# Altium PCB Open lid.PcbDoc
Units mil, origin at the board's own origin, x right, y up, seen from the top; angles counter-clockwise.
Board outline 4053.4 x 2111.4 mil, 2 copper layers (Top Layer, Bottom Layer); 37 components, 0 nets, 90 pads, 2 vias.
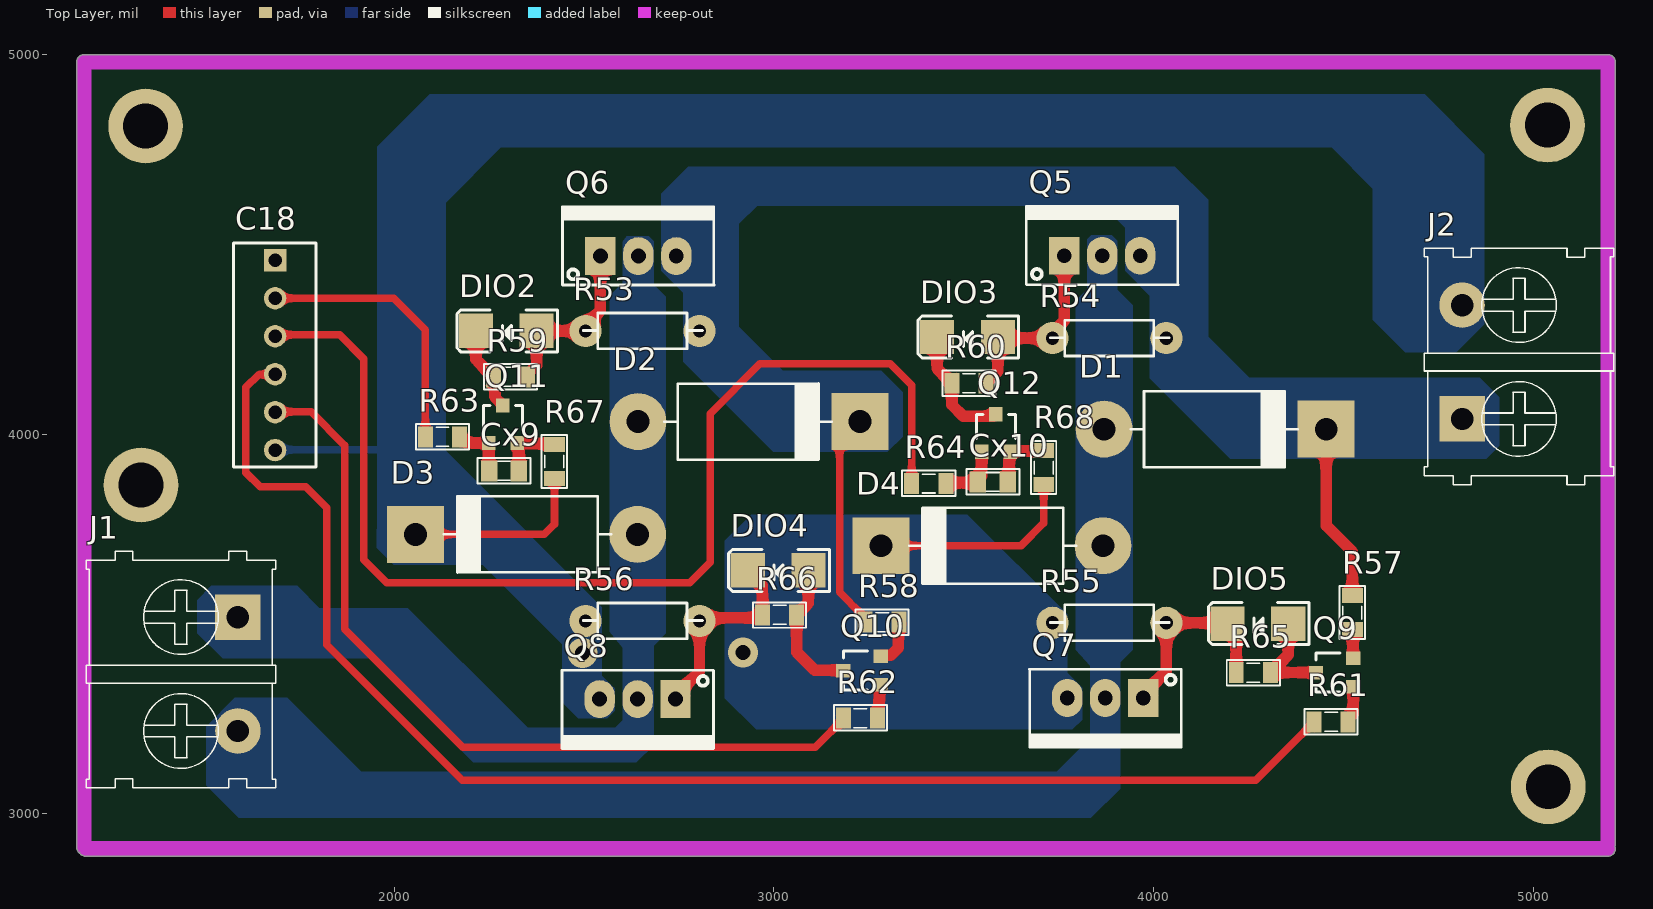
[diagram p0: Top Layer view]
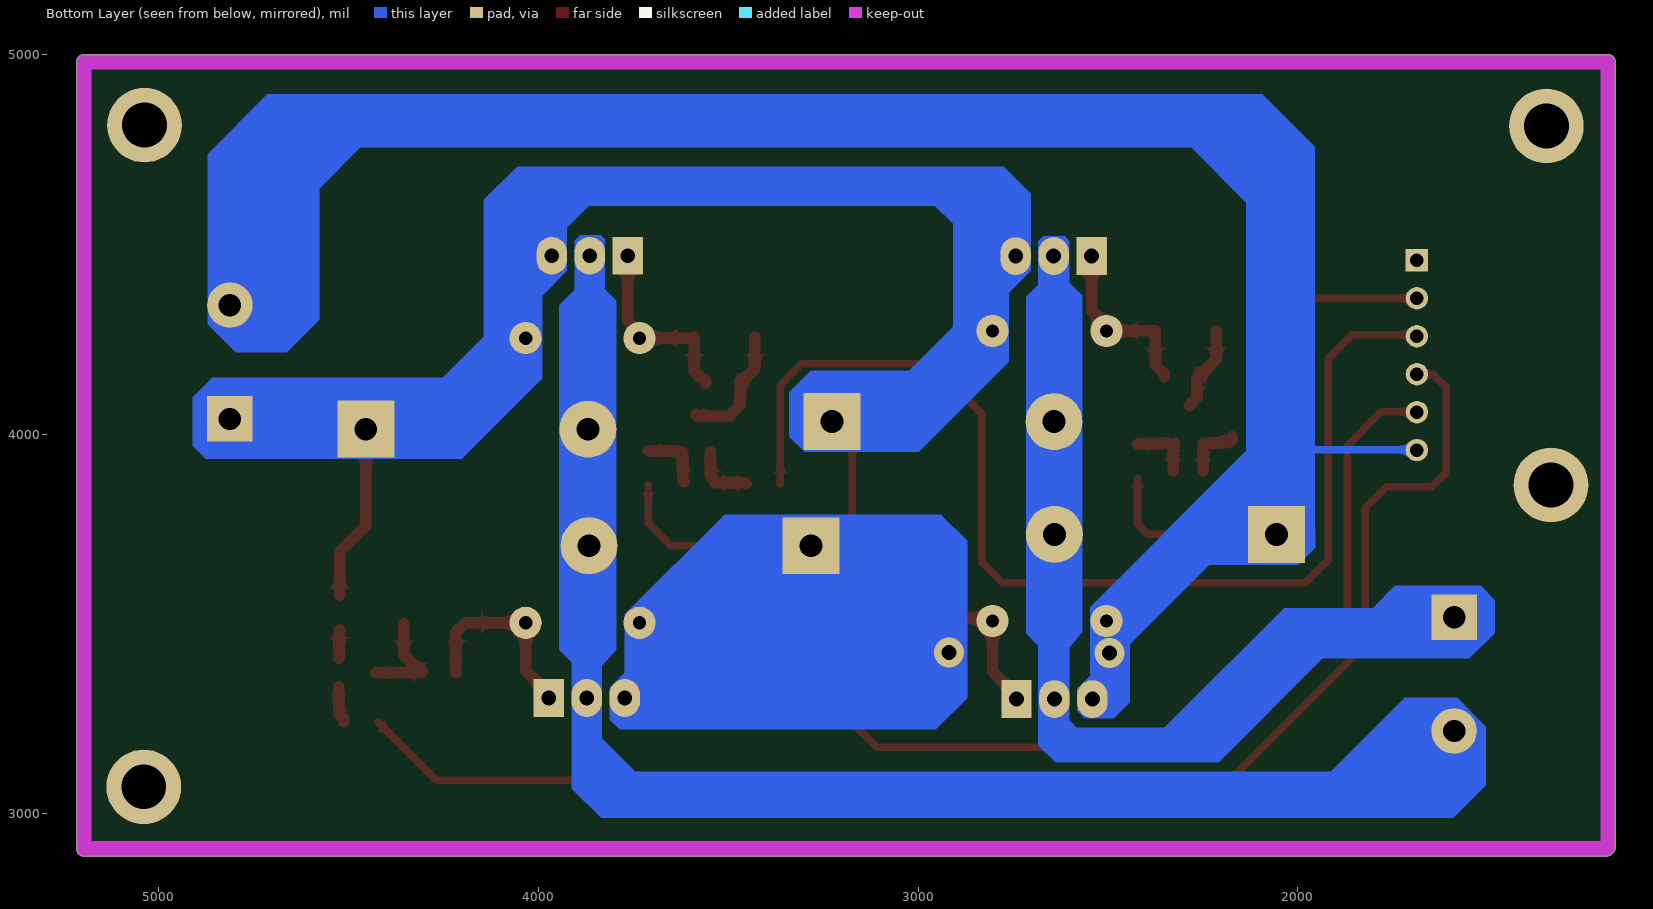
[diagram p1: Bottom Layer view, seen from below]

## Layer stack, top to bottom
Top Solder: solder mask 0.4, Solder Resist, Dk 3.5
Top Layer: signal copper 1.4
Dielectric 1: dielectric 12.6, FR-4, Dk 4.8
Bottom Layer: signal copper 1.4
Bottom Solder: solder mask 0.4, Solder Resist, Dk 3.5

## Board outline
1171.21,2896.21 cw(c1183,2912) 1163.3,2912 1163.3,4980 cw(c1183,4980) 1183,4999.7 5197,4999.7 cw(c5197,4980) 5216.7,4980 5216.7,2920 cw(c5197,2920) 5215.76,2914 cw(c5197,2908) 5216.7,2908 cw(c5197,2908) 5197,2888.3 1187,2888.3 cw(c1187,2908)

## Design rules (kind name [scope] priority, off if disabled: settings)
Clearance [All] p1: gap=10 ignorepadtopadclearanceinfootprint=FALSE
PlaneConnect [All] p1: planeconnectstyle=Direct reliefexpansion=20 reliefentries=4 reliefconductorwidth=10 reliefairgap=10
PolygonConnect [All] p1: connectstyle=Direct reliefconductorwidth=10 reliefentries=4 polygonreliefangle="90 Angle" airgapwidth=10
RoutingVias [All] p1: holewidth=28 width=50 viastyle="Through Hole" minholewidth=28 minwidth=50 maxholewidth=28 maxwidth=50
SolderMaskExpansion [All] p1: expansion=4 istentingtop=FALSE
Width [All] p1: maxlimit=30 minlimit=10 preferedwidth=20
29 further rules are at their usual default settings.

## Components (designator, comment, footprint, x,y, rotation, side; value= is the part's Value field where it differs from the comment)
C18 "Header6" HDR6 1686,4458 r270 top
Cx9 "104" CN-SMD-0805 2289,3903 r180 top value=33pF
Cx10 "104" CN-SMD-0805 3577,3874 r180 top value=33pF
D1 "5A" DIO-5A#1 4430,4013 r180 top value=1N5007
D2 "5A" DIO-5A#2 3202,4033 r180 top value=1N5007
D3 "5A" DIO-5A#1 2081,3736 r0 top value=1N5007
D4 "5A" DIO-5A#1 3307,3706 r0 top value=1N5007
DIO2 "M7" DIO-SMD-106 2295,4272 r0 top value=1N5007
DIO3 "M7" DIO-SMD-106 3510,4256 r0 top value=1N5007
DIO4 "M7" DIO-SMD-106 3011,3641 r0 top value=1N5007
DIO5 "M7" DIO-SMD-106 4275,3501 r0 top value=1N5007
J1 "KF2" KF2-7.62 1438,3368 r270 top
J2 "KF2" KF2-7.62 4963,4190 r90 top
Q5 "IRF4905" TO220-123 3765,4470 r0 top value=IRF840
Q6 "IR4905" TO220-123 2543,4469 r0 top value=IRF840
Q7 "IRF3205" TO220-123 3973,3305 r180 top value=IRF840
Q8 "IRF3205" TO220-123 2741,3302 r180 top value=IRF840
Q9 "2SA1015" SOT23-321 4477.21,3372 r90 top value=A1015
Q10 "2SA1015" SOT23-321 3232.21,3377 r90 top value=A1015
Q11 "2SC1815" SOT23-321 2286,4026 r0 top value=C1815
Q12 "2SC1815" SOT23-321 3585,4003 r0 top value=C1815
R53 "1k" RES-1/4W-SMALL 2664,4272 r180 top
R54 "1k" RES-1/4W-SMALL 3894,4253 r180 top
R55 "10k" RES-1/4W-SMALL 3894,3503 r180 top
R56 "10k" RES-1/4W-SMALL 2664,3508 r180 top
R57 "1k" RES-SMD-0805#1 4524,3530 r270 top
R58 "1k" RES-SMD-0805#1 3285,3505 r0 top
R59 "1k" RES-SMD-0805#2 2306,4151 r180 top
R60 "1k" RES-SMD-0805#2 3514,4134 r180 top
R61 "1k" RES-SMD-0805#2 4468,3242 r180 top
R62 "1k" RES-SMD-0805#2 3228,3252 r180 top
R63 "1k" RES-SMD-0805#2 2127,3993 r180 top
R64 "1k" RES-SMD-0805#2 3408,3870 r180 top
R65 "1k" RES-SMD-0805#2 4263,3372 r0 top
R66 "1k" RES-SMD-0805#2 3015,3524 r0 top
R67 "1k" RES-SMD-0805#1 2422,3928 r270 top
R68 "1k" RES-SMD-0805#1 3711,3912 r270 top

## Footprints (in the part's own frame and the unit in brackets; to place one, negate y for a bottom-side part, rotate by r counter-clockwise, add the part's x,y. Pads: shape width x height; smd on the part's side, far side on the other; paste and mask are expansions set on the pad)
CN-SMD-0805 [mil]
  rect 43.31x55 smd paste+0 mask-55: 1(-39.36,0.01) 2(39.37,0.01)
  silkscreen extent -70,-34 70,33, body extent -39,-25 39,25, height 31
DIO-5A#1 [mil] "Diode 5A, W 200mil, L 550mil"
  round 150 hole 60 paste+0 mask-150: 1(560,0)
  rect 150x150 hole 60 paste+0 mask-150: 2(-25,0)
  silkscreen extent 50,-100 490,100, body extent -52,-106 590,103, height 211
DIO-5A#2 [mil] "Diode 5A, W 200mil, L 550mil"
  round 150 hole 60 paste+0 mask-150: 1(560,0)
  rect 150x150 hole 60 paste+0: 2(-25,0)
  silkscreen extent 50,-100 490,100, body extent -52,-106 590,103, height 211
DIO-SMD-106 [mil]
  rect 90x90.55 smd paste+0 mask-90.55: 1(80,0) 2(-80,0)
  silkscreen extent -130,-55 135,55, body extent -99,-50 106,52, height 95
HDR6 [mm] "Connector; Header; 6 Position"
  rect 1.5x1.5 hole 0.9 paste+0 mask-1.5: 1(0,0)
  round 1.5 hole 0.9 paste+0 mask-1.5: 2(2.54,0) 3(5.08,0) 4(7.62,0) 5(10.16,0) 6(12.7,0)
  silkscreen extent -1.14,-2.79 13.84,2.74, body extent -1.27,-2.92 13.97,2.88, height 11.72
KF2-7.62 [mil]
  rect 120x120 hole 59.06 paste+0 mask-120: 1(-150,150)
  round 120 hole 59.06 paste+0 mask-120: 2(150,150)
  silkscreen extent -324,-250 300,250, body extent -300,-241 300,231, height 337
RES-1/4W-SMALL [mil]
  round 85 hole 35 paste+0 mask-85: 1(-140,0) 2(160,0)
  silkscreen extent -148,-47 166,47, body extent -152,-47 172,47, height 97
RES-SMD-0805#1 [mil]
  rect 39.37x55 smd: 1(-45,0) 2(45,0)
  silkscreen extent -70,-34 70,33, body extent -39,-25 39,25, height 31
RES-SMD-0805#2 [mil]
  rect 39.37x55 smd paste+0 mask-55: 1(-45,0) 2(45,0)
  silkscreen extent -70,-34 70,33, body extent -39,-25 39,25, height 31
SOT23-321 [mm]
  rect 0.9x0.95 smd mask+0: 1(0.95,-1.25)
  rect 0.9x0.95 smd paste+0 mask-0.95: 2(0,1.25) 3(-0.95,-1.25)
  silkscreen extent -1.3,-0.38 1.3,1.25, body extent -1.52,-1.23 1.48,1.27, height 1.06
TO220-123 [mil] "TO-220 - 1-2-3"
  rect 80x100 hole 39 paste+0 mask-100: 1(0,0)
  oval 80x100 hole 39 paste+0 mask-100: 2(100,0) 3(200,0)
  silkscreen extent -100,-76 300,130, body extent -95,-80 295,97, height 323

## Part data
C18: "Header IDC, 6 x 1 Pin Vertical 2.54mm Pitch (Non-Boxed, Male)", Manufacturer="W¨¹rth Elektronik eiSos GmbH", partNo=613002143121, ComponentLink1 Description=Manufacturer, ComponentLink1URL=http://www.we-online.com, ComponentLink2 Description=Datasheet, ComponentLink2URL=http://katalog.we-online.de/em/datasheet/6130xx143121.pdf, Created by="Karrer Zheng", Created Date="29 March 2013", NoPins=02
Cx9 Cx10: library part CN
D1 D2 D3 D4: library part Diode, "Default Diode", Code - JEDEC=DO-214-AB, Published=8-Jun-2000, Publisher="Altium Limited", Revision="July-2002: Re-released for DXP Platform."
DIO2 DIO3 DIO4 DIO5: library part "Diode SMD", "Default Diode", Code - JEDEC=DO-214-AB, Published=8-Jun-2000, Publisher="Altium Limited", Revision="July-2002: Re-released for DXP Platform."
J1 J2: Manufacturer="Würth Elektronik eiSos GmbH", partNo=691103110002, ComponentLink1 Description=Manufacturer, ComponentLink1URL=http://www.we-online.com, ComponentLink2 Description=Datasheet, ComponentLink2URL=http://katalog.we-online.de/em/datasheet/6911031100xx.pdf, Created by="Karrer Zheng", Created Date="29 October 2013", NoPins=2
Q5 Q6: library part IRF9540, "HEXFET P-Channel Power MOSFET"
Q7 Q8: library part IRFZ44
Q9 Q10: "PNP 600mW, ECB"
Q11 Q12: "NPN 600mW, ECB"
R53 R54 R55 R56: library part Res, "Res", Manufacturer="Generic Components", Class=Passive, Published=08/06/2000, Publisher="Altium Hobart Technology Centre", SubClass=R
R57 R58 R59 R60 R61 R62 R63 R64 R65 R66 R67 R68: library part Res-SMD, "Resistor", Manufacturer="Generic Components", Class=Passive, Published=08/06/2000, Publisher="Altium Hobart Technology Centre"

## Free pads (board coordinates)
  round 196.85 hole 118.11 paste+0 mask+0: 2(1333,3866) 2(1345,4812) 2(5038,4814) 2(5040,3071)

## Via types
v1: diameter 78.74, hole 39.37, Top Layer to Bottom Layer, 2 vias

## Nets (pads, with @x,y where several pads share a name; then routed paths per layer and width w, separated by ;. In a path a pad name is that pad's centre, name@x,y a point inside that pad or via, vN(x,y) a via of type N, cw(c..) or ccw(c..) an arc to the next point about the centre after c; other vN are vias at no path point)
pads on no net: C18.1 C18.2 C18.3 C18.4 C18.5 C18.6 Cx9.1 Cx9.2 Cx10.1 Cx10.2 D1.1 D1.2 D2.1 D2.2 D3.1 D3.2 D4.1 D4.2 DIO2.1 DIO2.2 DIO3.1 DIO3.2 DIO4.1 DIO4.2 DIO5.1 DIO5.2 J1.1 J1.2 J2.1 J2.2 Q5.1 Q5.2 Q5.3 Q6.1 Q6.2 Q6.3 Q7.1 Q7.2 Q7.3 Q8.1 Q8.2 Q8.3 Q9.1 Q9.2 Q9.3 Q10.1 Q10.2 Q10.3 Q11.1 Q11.2 Q11.3 Q12.1 Q12.2 Q12.3 R53.1 R53.2 R54.1 R54.2 R55.1 R55.2 R56.1 R56.2 R57.1 R57.2 R58.1 R58.2 R59.1 R59.2 R60.1 R60.2 R61.1 R61.2 R62.1 R62.2 R63.1 R63.2 R64.1 R64.2 R65.1 R65.2 R66.1 R66.2 R67.1 R67.2 R68.1 R68.2
copper on no net: | length 16385.6
  Top Layer w20: 1686,4058 1686.91,4058.91 1781.09,4058.91 1870,3970 1870,3486 2181,3175 3109,3175 3163.5,3229.5 3171.32,3229.5 3181,3239.19 3181,3247 ; 1686,4158 1684.91,4156.91 1642.91,4156.91 1609,4123 1609,3899 1647,3861 1767,3861 1822,3806 1822,3445 2179,3088 4269,3088 4423,3242 ; 1686,4258 1690,4262 1856,4262 1920,4198 1920,3669 1980,3609 2778,3609 2832,3663 2832,4054 2963,4185 3307,4185 3363,4129 3363,3870 ; 1686,4358 1999,4358 2082,4275 2082,3993 ; 2056,3736 2395,3736 2422,3763 2422,3883 ; 3227,4033 3173,3979 3173,3583 3230.31,3525.69 3230.31,3512.39 3239,3503.7 ; 3282,3706 3651,3706 3711,3766 3711,3867
  Top Layer w30: 2172,3993 2172,3985.19 2176.69,3980.5 2184.5,3980.5 2188.21,3976.79 2248.6,3976.79 2249.11,3976.27 2249.11,3903.51 2249.63,3902.99 ; 2215,4272 2215,4197 2248.5,4163.5 2256.32,4163.5 2261,4158.81 2261,4151 2265.69,4146.31 2265.69,4096.51 2286,4076.2 2286,4075.21 ; 2323.4,3976.79 2325.29,3974.89 ; 2328.36,3902.99 2328.36,3965.41 2326.12,3967.65 2326.12,3974.07 2325.29,3974.89 ; 2351,4151 2351,4158.81 2355.69,4163.5 2356.78,4163.5 2375,4181.72 2375,4272 2504,4272 2504,4286.88 2543,4325.88 2543,4469 ; 2422,3973 2420.11,3974.89 2325.29,3974.89 ; 2741,3302 2741,3312 2804,3375 2804,3508 2812,3516 2965.31,3516 2970,3520.69 2970,3524 2970,3601.72 2931,3640.72 2931,3641 ; 3091,3641 3091,3555 3072.5,3536.5 3064.69,3536.5 3060,3531.81 3060,3524 3060,3425.57 3107.57,3378 3182,3378 3183,3377 ; 3271,3254.81 3277.69,3261.5 3277.69,3324.5 3277.72,3324.54 3277.72,3336.88 3280.44,3339.6 3281.43,3339.6 ; 3281.43,3414.4 3284.14,3417.12 3308.12,3417.12 3327.55,3436.55 3327.55,3492.5 3334.17,3499.12 ; 3430,4256 3430,4173 3456.5,4146.5 3464.32,4146.5 3469,4141.81 3469,4134 3469,4077 3499,4047 3579.79,4047 3581.3,4048.51 3582.28,4048.51 3585,4051.23 3585,4052.21 ; 3453,3870 3455,3872 3535.63,3872 3537.63,3873.99 3537.63,3879.84 3547.6,3889.81 3547.6,3953.79 ; 3559,4134 3559,4141.81 3563.69,4146.5 3570.78,4146.5 3590,4165.72 3590,4256 3593,4253 3734,4253 3734,4267.88 3765,4298.88 3765,4470 ; 3616.36,3873.99 3619.68,3877.31 3619.68,3951.07 3622.4,3953.79 3624.01,3955.39 3709.39,3955.39 3711,3957 ; 3973,3305 3973,3315 4034,3376 4034,3503 4193,3503 4195,3501 4218,3478 4218,3372 ; 4355,3501 4355,3419 4320.5,3384.5 4312.68,3384.5 4308,3379.81 4308,3372 4428,3372 ; 4455,4013 4455,3759 4524,3690 4524,3575 ; 4513,3242 4513,3249.81 4526.43,3263.24 4526.43,3334.6 ; 4524,3485 4525.21,3483.79 4525.21,3410.61 4526.43,3409.4
  Bottom Layer w20: 1686,3958 1687,3959 2006,3959 ; v1@2495,3422 v1(2496,3423)
  other v1: 2919,3425

## Keep-outs
Keep-Out Layer:
  lines w39.37: 1183,2912 1183,4980 5197,4980 5197,2920 ; 1187,2908 5197,2908

## Other copper
Bottom Layer:
  region: 2729,4539
  region: 2755,4537 2727,4537 2703,4513 2703,4430 2761,4372 2761,4191 2999,3953 3299,3953 3339,3993 3339,4111 3283,4167 3024,4167 2908,4283 2908,4495 2865,4538
  region: 3963,4536
  region: 3963,4536 3925,4498 3925,4430 3990,4365 3990,4147 4202,3935 4552,3935 4593,3976 4593,4087 4532,4148 4252,4148 4144,4256 4144,4490 4098,4536
  region: 2613,4521 2670,4521 2683,4508 2683,4394 2715,4362 2715,3475 2683,3443 2683,3265 2667,3249 2619,3249 2602,3266 2602,3437.27 2567,3479 2567,4364 2602,4399 2602,4507
  region: 3839,4524 3890,4524 3905,4509 3905,4380 3945,4340 3945,4044 3945,3432 3912,3399 3912,3271 3892,3251 3853,3251 3834,3270 3834,3390 3795,3431.72 3795,4352 3825,4382 3825,4513 3836,4524
  region: 1954.49,3799.49 1993,3838 2253,3838 2547,3544 2547,3363 2571,3339 2581,3330.2 2581,3271 2561,3251 2485,3251 2442,3294 2442,3447 2233,3656 1998,3656 1953.66,3700.34
  region: 4553,4141
  region: 4462,4148 4860,4148 4911,4097 4911,3969 4877,3935 4476,3935 4420,3991 4421,3992 4421,4107
  region: 2703,4430 2703,4633 2775,4705 4056,4705 4144,4617 4144,4384 4114.69,4354.69 4000.31,4354.69 3925,4430 3925,4544.39 3867.39,4602 2956,4602 2908,4554 2908,4439 2856,4387 2747,4387
  region: 1686,3958
  region: 2683,3321
  region: 2683,3265
  region: 2683,3265 2683,3181 2638,3136 2208,3136 1935,3409 1548,3409 1481,3476 1481,3563 1518,3600 1744,3600 1802,3542 2036,3542 2324,3254 2352,3226 2582,3226 2602,3246 2602,3342 2620,3360 2666,3360 2683,3343
  region: 3912,3271
  region: 3912,3271
  region: 3912,3271
  region: 3912,3271 3912,3066 3835,2989 1590,2989 1504,3075 1504,3229 1580,3305 1718,3305 1913,3110 3745.55,3110 3834,3198.45 3834,3353 3846,3365 3902,3365 3912,3355
  region: 1954.49,3749.91 1954.49,4756.49 2093,4895 4714,4895 4871,4738 4871,4290 4797,4216 4663,4216 4578,4301 4578,4647 4469,4756 2281,4756 2135,4610 2135,3956 2353.77,3737.23
  region: 2940,3788 3510,3788 3773,3525 3773,3371 3812,3332 3812,3248 3786,3222 2953,3222 2871,3304 2871,3719

## Silkscreen, mask and mechanical layers (free items; w line width, h text height)
Bottom Solder:
  lines w30: 2905,3615 3040,3750 ; 2919,3425 3001,3425 3282,3706 ; 2935,3530 3140,3735 ; 2950,3275 3290,3615 ; 3045,3240 3525,3720 ; 3185,3245 3585,3645 ; 3340,3255 3660,3575 ; 3510,3260 3690,3440 ; 3625,3255 3745,3375
  lines w50: 1588,3218 1588,3217 1760,3045 3800,3045 3873,3118 3873,4462 3865,4470 ; 1588,3518 1712,3518 1755,3475 1980,3475 2260,3195 2275,3180 2610,3180 2641,3211 ; 2056,3736 2056,4696 2185,4825 2255,4825 4580,4825 4795,4610 4795,4350 4805,4340 ; 2145,3825 2462,3508 2504,3508 2472,3508 ; 2641,3302 2643,3304 2643,4469 ; 2804,4272 2804,4594 2860,4650 3960,4650 4065,4545 4065,4275 ; 2810,4280 2810,4270 3047,4033 3227,4033 ; 4060,4190 4215,4035 4790,4035 4810,4055 ; 4655,4310 4655,4605